# Altium PCB PowerDistribution.PcbDoc (part 1 of 3)
Units mm, origin at the board's own origin, x right, y up, seen from the top; angles counter-clockwise.
Board outline 120 x 100 mm, 4 copper layers (Component Side, Ground, Power, Solder Side), stack 0.844 mm thick; 193 components, 120 nets, 734 pads, 6 vias.
Unrouted connection lines stored in the file: 508.
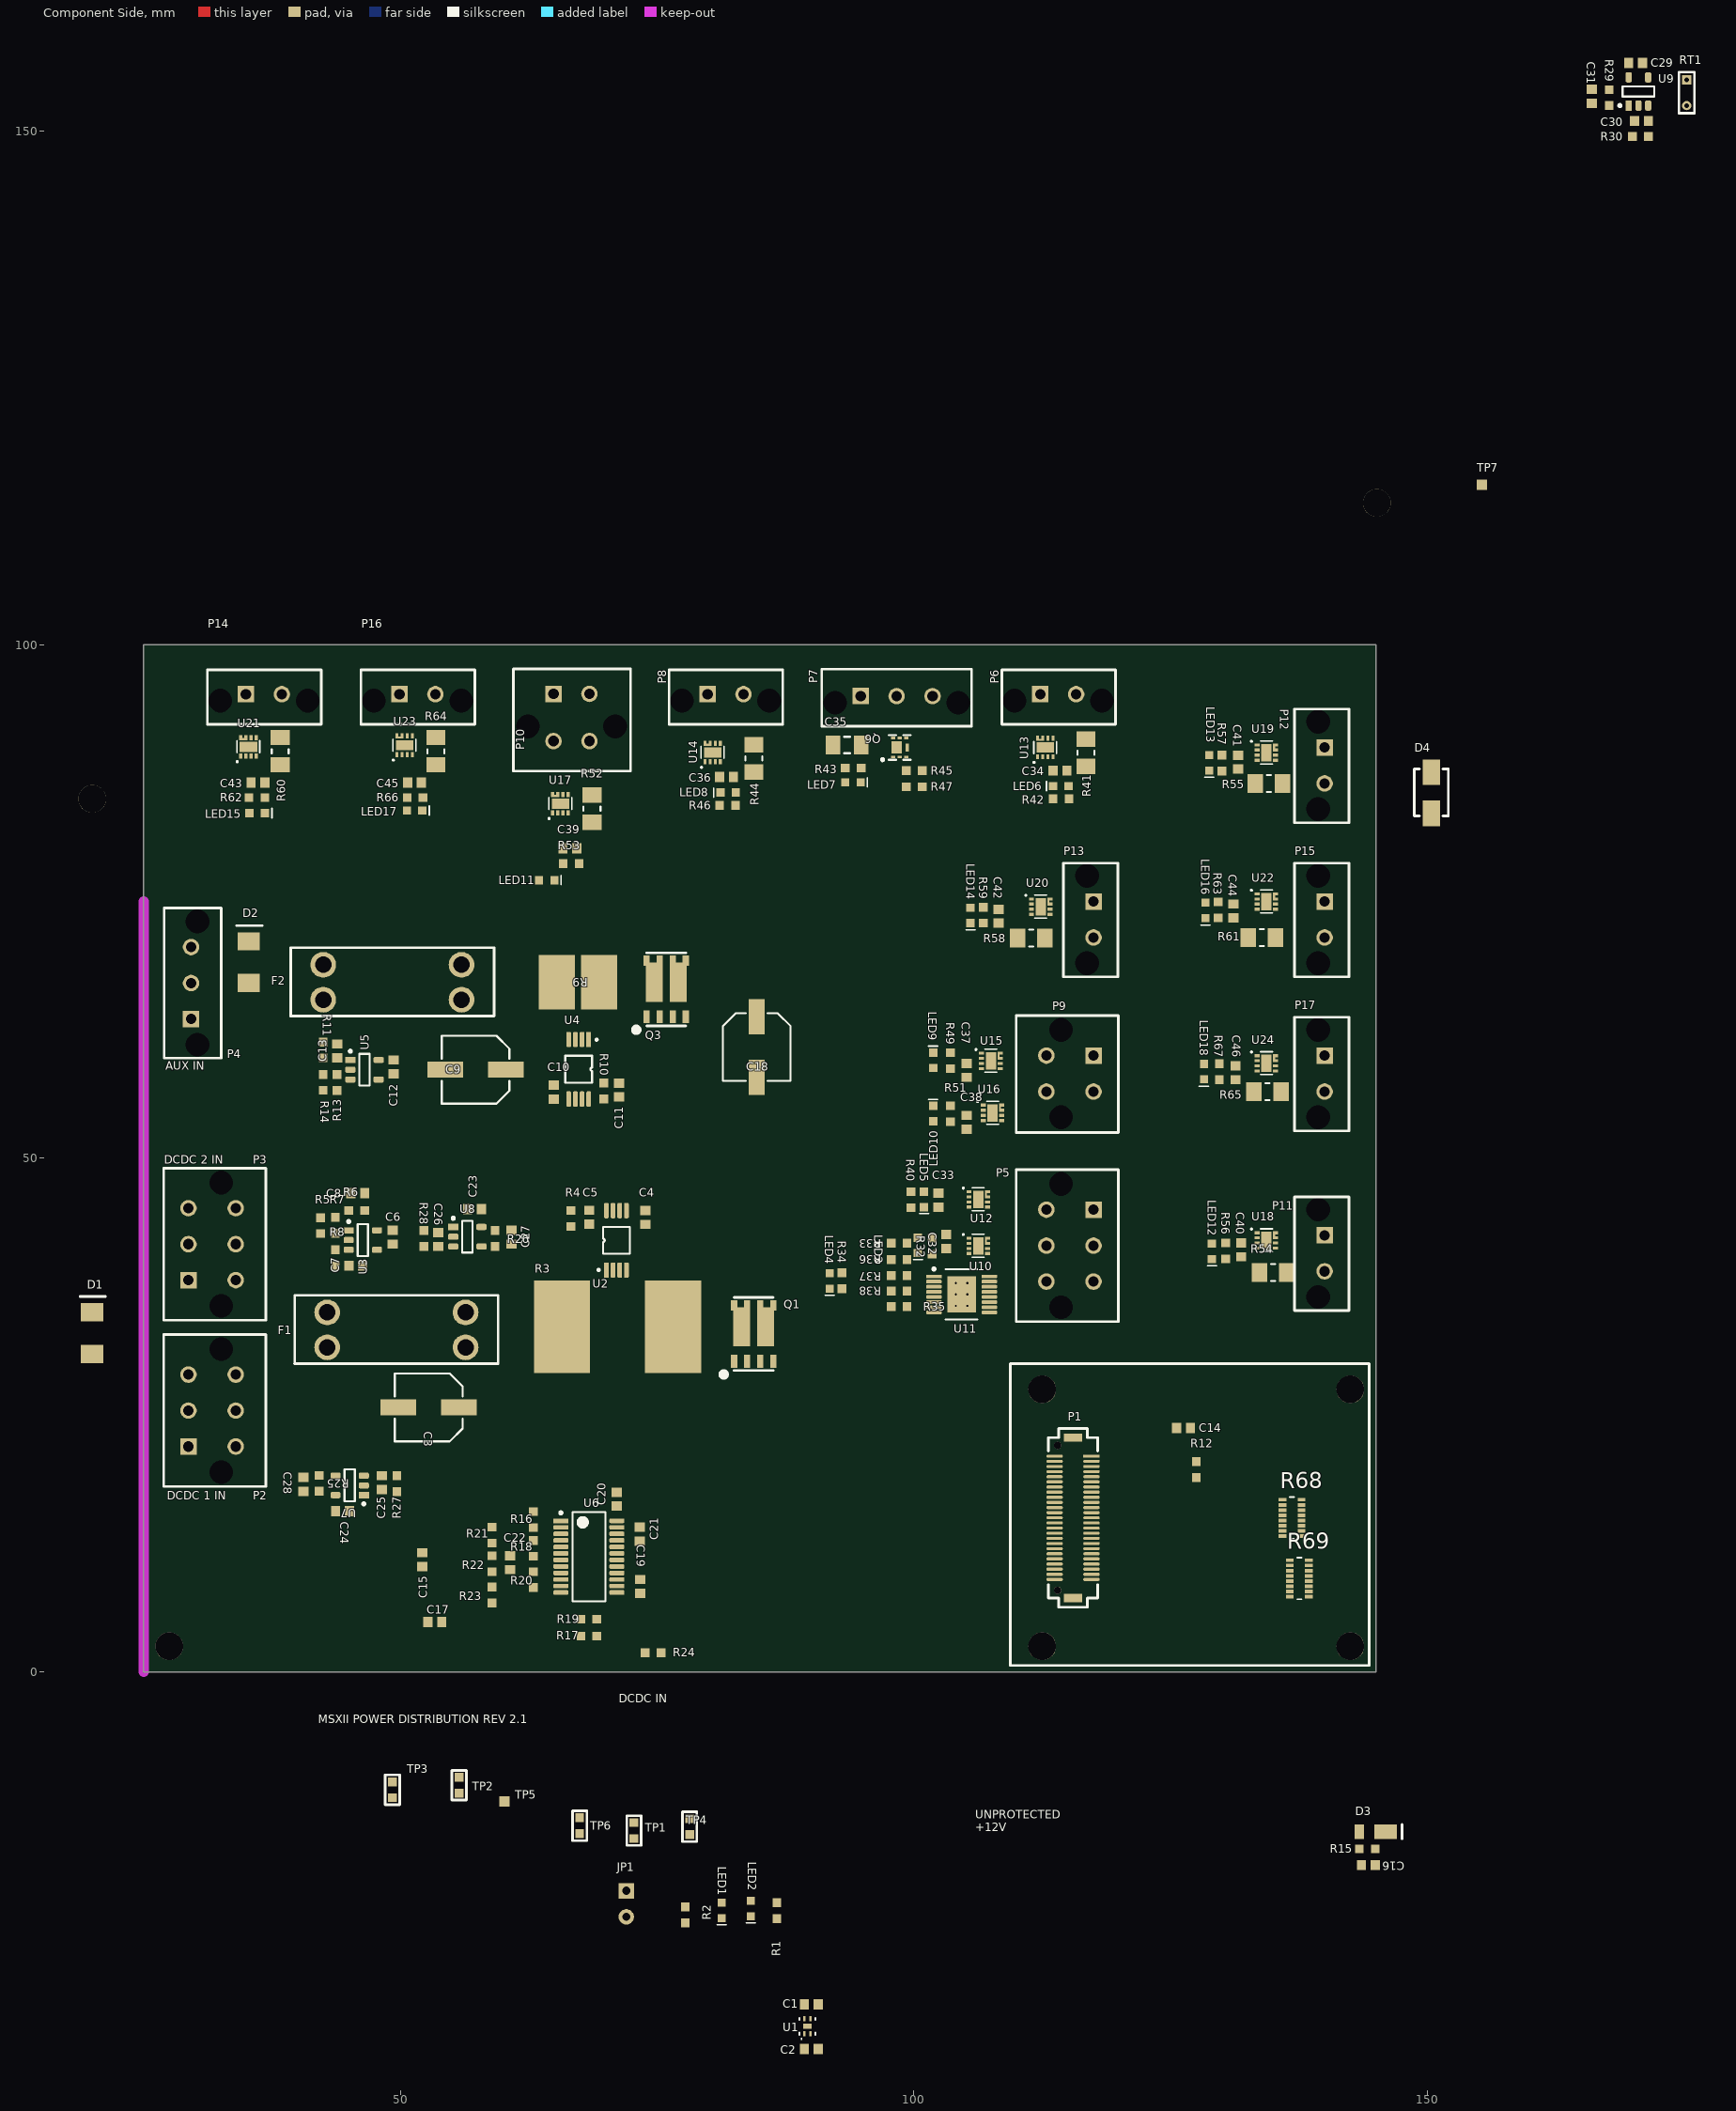
[diagram p0: Component Side view]
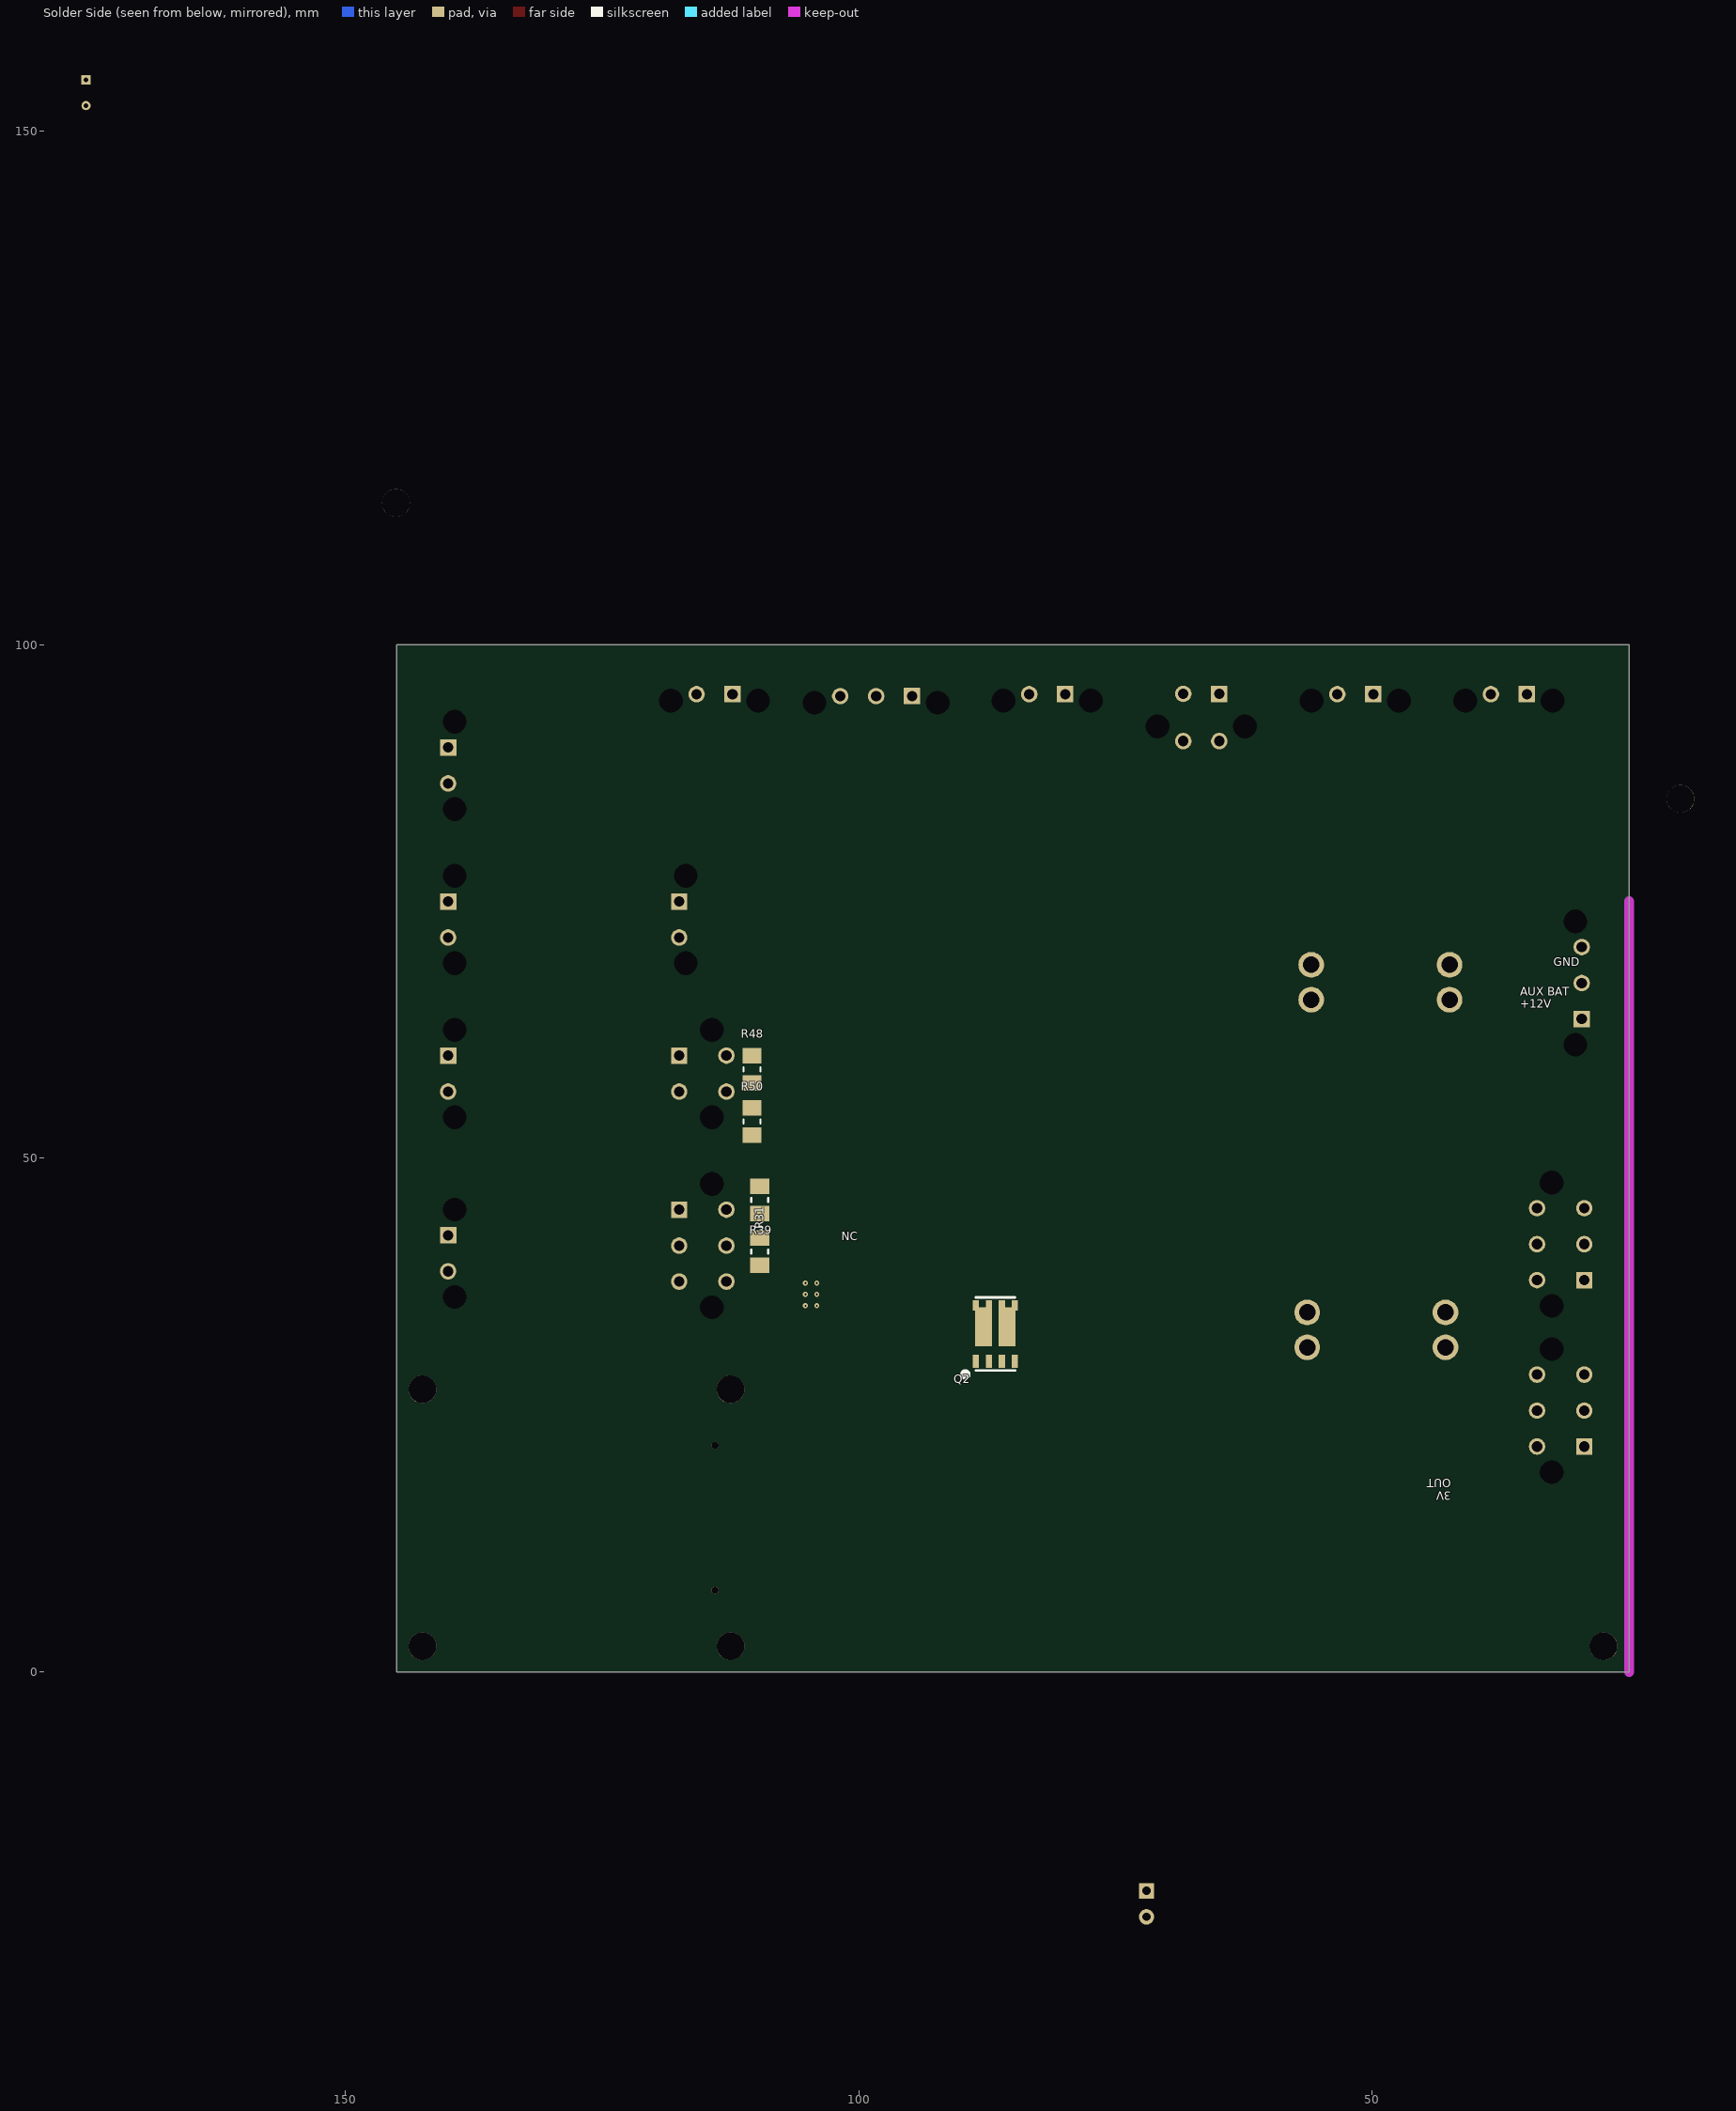
[diagram p1: Solder Side view, seen from below]

## Layer stack, top to bottom
Top Solder: solder mask 0.0102, Solder Resist, Dk 3.5
Component Side: signal copper 0.0356
Dielectric 1: core 0.32, FR-4, Dk 4.8
Ground: signal copper 0.036
Dielectric 3: prepreg 0.127, Dk 4.2
Power: signal copper 0.036
Dielectric 4: core 0.254, Dk 4.2
Solder Side: signal copper 0.0356
Bottom Solder: solder mask 0.0102, Solder Resist, Dk 3.5

## Board outline
25,100 145,100 145,0 25,0

## Design rules (kind name [scope] priority, off if disabled: settings)
BoardOutlineClearance [All] p1: gap=0.3 ignorepadtopadclearanceinfootprint=FALSE
Clearance [All] p1: gap=0.152 ignorepadtopadclearanceinfootprint=TRUE except(0: Arc-Hole Track-Hole SMDPad-Hole THPad-Hole Via-Hole Fill-Hole Poly-Hole Region-Hole Text-Hole)
PlaneConnect "Schematic Power Plane Connect Style_1" [InNetClass('HighCurrent')] p1: planeconnectstyle=Direct reliefexpansion=0.508 reliefentries=4 reliefconductorwidth=0.254 reliefairgap=0.254
PlaneConnect [All] p2: planeconnectstyle=Direct reliefexpansion=0.508 reliefentries=4 reliefconductorwidth=0.254 reliefairgap=0.254
PolygonConnect "Schematic Polygon Connect Style" [InNetClass('HighCurrent')] p1: connectstyle=Direct reliefconductorwidth=0.254 reliefentries=4 polygonreliefangle="45 Angle" airgapwidth=0.254
PolygonConnect Vias [IsVia] p2: connectstyle=Direct reliefconductorwidth=0.254 reliefentries=4 polygonreliefangle="90 Angle" airgapwidth=0.254
PolygonConnect Pads [IsPad AND NOT InNetClass('HighCurrent')] p3: connectstyle=Relief reliefconductorwidth=0.254 reliefentries=4 polygonreliefangle="90 Angle" airgapwidth=0.254
PolygonConnect "High Current" [InNetClass('HighCurrent') and ispad] p4: connectstyle=Direct reliefconductorwidth=0.254 reliefentries=4 polygonreliefangle="90 Angle" airgapwidth=0.254
RoutingVias [All] p1: holewidth=0.3 width=0.6 viastyle="Through Hole" minholewidth=0.305 minwidth=0.762 maxholewidth=0.889 maxwidth=1.651 useviatemplates=TRUE viatemplateguid#1={41F559C4-FE34-4FF1-914F-6CF3D8C9EF6F} viatemplateguid#2={CAA2D8BC-5EEC-4D50-9A6F-782E2C8CEBF2} viatemplatename#1=v50h20 viatemplatename#2=v60h30m0mx0
SolderMaskExpansion [All] p1: expansion=0.102
Width [All] p1: maxlimit=0.254 minlimit=0.254 preferedwidth=0.254
29 further rules are at their usual default settings.

## Classes and differential pairs
component class "Power Distribution - Spare Outputs": C43 C44 C45 C46 LED15 LED16 LED17 LED18 P14 P15 P16 P17 R60 R61 R62 R63 R64 R65 R66 R67 U21 U22 U23 U24
component class "Power Distribution - Roof Enclosure": C37 C38 LED9 LED10 P9 R48 R49 R50 R51 U15 U16
component class "Power Distribution - Misc Boards": C39 C40 C41 C42 LED11 LED12 LED13 LED14 P10 P11 P12 P13 R52 R53 R54 R55 R56 R57 R58 R59 U17 U18 U19 U20
component class "Power Distribution - Aux Battery": C9 C10 C11 C12 C13 C14 D2 F2 P4 R9 R10 R11 R12 R13 R14 TP4 U4 U5
net class HighCurrent: AUX_BAT_IN AUX_FUSED BMS_CARRIER_PWR CHARGER_INTERFACE DCDC_UNFUSED DRV_CTRL_PWR DRV_DISP_PWR FRONT_LIGHTS_PWR FRONT_SOLAR_SENSE GND MOTOR_INTERFACE_EN NetC3_1 NetC9_1 PROT_12V PROT_SPARE1_PWR PROT_SPARE2_PWR REAR_CAMERA_PWR REAR_LIGHTS_PWR REAR_SOLAR_SENSE TELEMETRY_PWR UNPROT_12V UNPROT_SPARE1_PWR UNPROT_SPARE2_PWR VS1 VS2
component class "Power Distribution - Power Path": C15 C16 C17 C18 C19 C20 C21 C22 C_DNP1 C_DNP2 D3 Q1 Q2 Q3 R15 R16 R17 R18 R19 R20 R21 R22 R23 R24 TP5 TP6 TP7 U6
component class "Power Distribution - DC-DC": C3 C4 C5 C6 C7 C8 D1 "DCDC IN" F1 P2 P3 "PROT 12V" R3 R4 R5 R6 R7 R8 TP3 U2 U3
component class "Power Distribution - PJB": C34 C35 C36 D4 LED6 LED7 LED8 P6 P7 P8 Q6 R41 R42 R43 R44 R45 R46 R47 U13 U14
component class "Power Distribution - Front Enclosure": C32 C33 JP1 LED3 LED4 LED5 P5 R31 R32 R33 R34 R35 R36 R37 R38 R39 R40 U10 U11 U12
component class "Power Distribution - Temperature Sense": C23 C24 C25 C26 C27 C28 C29 C30 C31 R25 R26 R27 R28 R29 R30 RT1 U7 U8 U9
component class Controller_Board_Interface: C1 C2 LED1 LED2 P1 R1 R2 R68 R69 TP1 TP2 U1

## Components (designator, comment, footprint, x,y, rotation, side; value= is the part's Value field where it differs from the comment)
C1 "CAP CER 1UF 50V 10% X7R 0603" "CAP, 0603" 90.008,-32.366 r0 top
C2 "CAP CER 1UF 50V 10% X7R 0603" "CAP, 0603" 90.008,-36.725 r0 top
C3 "47uF" "CAP ALUM 6.3MM RADIAL SMD" 52.76,25.742 r180 top
C4 "CAP CER 0.1UF 50V 10% X7R 0603" "CAP, 0603" 73.857,44.239 r270 top
C5 "CAP CER 10nF 50V 5% X7R 0603" "CAP, 0603" 68.393,44.264 r270 top
C6 "CAP CER 0.1UF 50V 10% X7R 0603" "CAP, 0603" 49.265,42.318 r270 top
C7 "CAP CER 10nF 50V 5% X7R 0603" "CAP, 0603" 45.66,39.543 r0 top
C8 "CAP CER 10nF 50V 5% X7R 0603" "CAP, 0603" 45.86,46.604 r180 top
C9 "47uF" "CAP ALUM 6.3MM RADIAL SMD" 57.324,58.627 r180 top
C10 "CAP CER 0.1UF 50V 10% X7R 0603" "CAP, 0603" 64.954,56.446 r90 top
C11 "CAP CER 10nF 50V 5% X7R 0603" "CAP, 0603" 71.285,56.652 r270 top
C12 "CAP CER 0.1UF 50V 10% X7R 0603" "CAP, 0603" 49.361,58.902 r270 top
C13 "CAP CER 10nF 50V 5% X7R 0603" "CAP, 0603" 43.845,60.452 r90 top
C14 "CAP CER 10nF 50V 5% X7R 0603" "CAP, 0603" 126.25,23.726 r0 top
C15 "CAP CER 0.1UF 50V 10% X7R 0603" "CAP, 0603" 52.116,10.927 r270 top
C16 "CAP CER 6800pF 50V 10% X7R 0603" "CAP, 0603" 144.252,-18.808 r0 top
C17 "68nF" "CAP, 0603" 53.357,4.866 r180 top
C18 "100UF" "CAP ALUM 6.3MM RADIAL SMD" 84.7,60.834 r270 top
C19 "CAP CER 0.1UF 50V 10% X7R 0603" "CAP, 0603" 73.357,8.318 r270 top
C20 "CAP CER 0.1UF 50V 10% X7R 0603" "CAP, 0603" 71.082,16.819 r90 top
C21 "CAP CER 0.1UF 50V 10% X7R 0603" "CAP, 0603" 73.315,13.411 r270 top
C22 "CAP CER 0.022UF 50V 10% X7R 0603" "CAP, 0603" 60.68,10.63 r270 top
C23 "CAP CER 0.1UF 50V 10% X7R 0603" "CAP, 0603" 57.227,45.066 r180 top
C24 "CAP CER 0.1UF 50V 10% X7R 0603" "CAP, 0603" 44.368,15.657 r0 top
C25 "CAP CER 10nF 50V 5% X7R 0603" "CAP, 0603" 48.193,18.432 r270 top
C26 "CAP CER 10nF 50V 5% X7R 0603" "CAP, 0603" 53.69,42.093 r90 top
C27 "CAP CER 10nF 50V 5% X7R 0603" "CAP, 0603" 60.818,42.318 r270 top
C28 "CAP CER 10nF 50V 5% X7R 0603" "CAP, 0603" 40.554,18.257 r90 top
C29 "CAP CER 0.1UF 50V 10% X7R 0603" "CAP, 0603" 170.274,156.658 r0 top
C30 "CAP CER 10nF 50V 5% X7R 0603" "CAP, 0603" 170.85,151 r180 top
C31 "CAP CER 10nF 50V 5% X7R 0603" "CAP, 0603" 166,153.4 r270 top
C32 "CAP CER 0.1UF 50V 10% X7R 0603" "CAP, 0603" 103.15,41.9 r90 top
C33 "CAP CER 0.1UF 50V 10% X7R 0603" "CAP, 0603" 102.4,45.925 r90 top
C34 "CAP CER 0.1UF 50V 10% X7R 0603" "CAP, 0603" 114.229,87.75 r0 top
C35 "CAP CER 2.2UF 100V ±20% X7R 1206" "CAP, 1206" 93.498,90.25 r180 top
C36 "CAP CER 0.1UF 50V 10% X7R 0603" "CAP, 0603" 81.764,87.12 r0 top
C37 "CAP CER 0.1UF 50V 10% X7R 0603" "CAP, 0603" 105.15,58.565 r270 top
C38 "CAP CER 0.1UF 50V 10% X7R 0603" "CAP, 0603" 105.15,53.5 r270 top
C39 "CAP CER 0.1UF 50V 10% X7R 0603" "CAP, 0603" 66.509,80.185 r0 top
C40 "CAP CER 0.1UF 50V 10% X7R 0603" "CAP, 0603" 131.87,41.084 r270 top
C41 "CAP CER 0.1UF 50V 10% X7R 0603" "CAP, 0603" 131.575,88.575 r270 top
C42 "CAP CER 0.1UF 50V 10% X7R 0603" "CAP, 0603" 108.25,73.575 r270 top
C43 "CAP CER 0.1UF 50V 10% X7R 0603" "CAP, 0603" 36.139,86.595 r0 top
C44 "CAP CER 0.1UF 50V 10% X7R 0603" "CAP, 0603" 131.12,74.094 r270 top
C45 "CAP CER 0.1UF 50V 10% X7R 0603" "CAP, 0603" 51.38,86.595 r0 top
C46 "CAP CER 0.1UF 50V 10% X7R 0603" "CAP, 0603" 131.325,58.325 r270 top
D1 "DIODE TVS 15VWM 24.4VC DO-214AA (SMB)" "DO-214AA Diode" 19.985,30.943 r90 top
D2 "DIODE TVS 15VWM 24.4VC DO-214AA (SMB)" "DO-214AA Diode" 35.235,67.064 r90 top
D3 "DIODE SCHOTTKY 30V 1A POWERDI123" "DIODE SCHOTTKY 30V 1A POWERDI123" 143.377,-15.55 r0 top
D4 "DIODE SCHOTTKY 60V 3A SMA" "Diode, SMA" 150.38,83.586 r90 top
F1 "?A" "FUSE ATO/ATC FUSE HOLDER" 42.882,35 r0 top
F2 "?A" "FUSE ATO/ATC FUSE HOLDER" 42.49,68.844 r0 top
JP1 "JUMPER" "CONN 2POS JUMPER 0.1\"" 71.998,-21.311 r270 top
LED1 "LED GREEN CLEAR 2V 0603" LED_0603 81.282,-22.525 r270 top
LED2 "LED YELLOW CLEAR 2.1V 0603" LED_0603 84.114,-22.338 r270 top
LED3 "LED GREEN CLEAR 2V 0603" LED_0603 100.365,42.225 r270 top
LED4 "LED YELLOW CLEAR 2.1V 0603" LED_0603 91.79,38.755 r270 top
LED5 "LED YELLOW CLEAR 2.1V 0603" LED_0603 100.965,46.7 r270 top
LED6 "LED YELLOW CLEAR 2.1V 0603" LED_0603 115.004,86.26 r180 top
LED7 "LED GREEN CLEAR 2V 0603" LED_0603 93.373,86.585 r0 top
LED8 "LED GREEN CLEAR 2V 0603" LED_0603 82.614,85.63 r180 top
LED9 "LED GREEN CLEAR 2V 0603" LED_0603 101.91,58.84 r90 top
LED10 "LED YELLOW CLEAR 2.1V 0603" LED_0603 101.91,53.66 r90 top
LED11 "LED YELLOW CLEAR 2.1V 0603" LED_0603 63.559,77.055 r0 top
LED12 "LED YELLOW CLEAR 2.1V 0603" LED_0603 129.01,41.634 r270 top
LED13 "LED YELLOW CLEAR 2.1V 0603" LED_0603 128.74,89.2 r270 top
LED14 "LED YELLOW CLEAR 2.1V 0603" LED_0603 105.49,74.35 r270 top
LED15 "LED GREEN CLEAR 2V 0603" LED_0603 35.364,83.61 r0 top
LED16 "LED YELLOW CLEAR 2.1V 0603" LED_0603 128.393,74.844 r270 top
LED17 "LED GREEN CLEAR 2V 0603" LED_0603 50.689,83.86 r0 top
LED18 "LED YELLOW CLEAR 2.1V 0603" LED_0603 128.24,59.15 r270 top
P1 "CONN 50POS Bergstak Plug 0.02\"" "CONN, Bergstak 50 Pos Plug" 115.5,15 r0 top
P2 "CONN 6POS ULTRA-FIT 0.138\"" "CONN, 6POS ULTRA-FIT" 29.37,21.943 r90 top
P3 "CONN 6POS ULTRA-FIT 0.138\"" "CONN, 6POS ULTRA-FIT" 29.37,38.143 r90 top
P4 "CONN 3POS ULTRA-FIT 0.138\"" "CONN, 3POS ULTRA-FIT"#1 30.25,61.064 r90 top
P5 "CONN 6POS ULTRA-FIT 0.138\"" "CONN, 6POS ULTRA-FIT" 117.5,45 r270 top
P6 "CONN 2POS ULTRA-FIT 0.138\"" "CONN, 2POS ULTRA-FIT" 112.304,95.19 r0 top
P7 "CONN 3POS ULTRA-FIT 0.138\"" "CONN, 3POS ULTRA-FIT"#2 94.82,95 r0 top
P8 "CONN 2POS ULTRA-FIT NATURAL COLOR 0.138\"" "CONN, 2POS ULTRA-FIT - NATURAL COLOR" 79.914,95.19 r0 top
P9 "BLK" "CONN, 4POS 2 ROW ULTRA-FIT" 117.5,60 r270 top
P10 "BLK" "CONN, 4POS 2 ROW ULTRA-FIT" 64.914,95.225 r0 top
P11 "CONN 2POS ULTRA-FIT NATURAL COLOR 0.138\"" "CONN, 2POS ULTRA-FIT - NATURAL COLOR" 140,42.5 r270 top
P12 "CONN 2POS ULTRA-FIT NATURAL COLOR 0.138\"" "CONN, 2POS ULTRA-FIT - NATURAL COLOR" 140,90 r270 top
P13 "CONN 2POS ULTRA-FIT NATURAL COLOR 0.138\"" "CONN, 2POS ULTRA-FIT - NATURAL COLOR" 117.5,75 r270 top
P14 "CONN 2POS ULTRA-FIT 0.138\"" "CONN, 2POS ULTRA-FIT" 34.964,95.19 r0 top
P15 "CONN 2POS ULTRA-FIT NATURAL COLOR 0.138\"" "CONN, 2POS ULTRA-FIT - NATURAL COLOR" 140,75 r270 top
P16 "CONN 2POS ULTRA-FIT 0.138\"" "CONN, 2POS ULTRA-FIT" 49.914,95.19 r0 top
P17 "CONN 2POS ULTRA-FIT NATURAL COLOR 0.138\"" "CONN, 2POS ULTRA-FIT - NATURAL COLOR" 140,60 r270 top
Q1 "MOSFET P-CH DUAL 30V 60A PPAK SO-8" "MOSFET 2P-CH 30V 60A PPAK SO-8" 82.498,30.229 r90 top
Q2 "MOSFET P-CH DUAL 30V 60A PPAK SO-8" "MOSFET 2P-CH 30V 60A PPAK SO-8" 88.618,30.229 r90 bottom
Q3 "MOSFET P-CH DUAL 30V 60A PPAK SO-8" "MOSFET 2P-CH 30V 60A PPAK SO-8" 73.985,63.784 r90 top
Q6 "MOSFET N-CH 30V 8.7A 2.1W 6-PQFN (2x2)" "MOSFET N-CH 30V 12A 2mmx2mm PQFN" 97.97,89.075 r0 top
R1 "RES 4.7K OHM 1% 1/10W 0603" "RES, 0603" 86.666,-23.25 r90 top
R2 "RES 4.7K OHM 1% 1/10W 0603" "RES, 0603" 77.75,-23.653 r90 top
R3 "RES 0.004 OHM 1% 7W 5931" "RES 5931" 65.757,33.59 r0 top
R4 "RES 100 OHM 1% 1/10W 0603" "RES, 0603" 66.618,44.139 r270 top
R5 "RES 470K OHM 1% 1/4W 0603" "RES, 0603" 42.24,43.445 r90 top
R6 "RES 100 OHM 1% 1/10W 0603" "RES, 0603" 45.76,44.92 r0 top
R7 "RES 100K OHM 5% 1/8W 0603" "RES, 0603" 43.673,43.47 r270 top
R8 "RES 10K OHM 1% 1/10W 0603" "RES, 0603" 43.673,40.318 r270 top
R9 "15 mOhm" "RES 2818" 65.247,67.144 r0 top
R10 "RES 100 OHM 1% 1/10W 0603" "RES, 0603" 69.811,56.552 r90 top
R11 "RES 470K OHM 1% 1/4W 0603" "RES, 0603" 42.49,60.552 r270 top
R12 "RES 100 OHM 1% 1/10W 0603" "RES, 0603" 127.5,19.697 r90 top
R13 "RES 100K OHM 5% 1/8W 0603" "RES, 0603" 43.845,57.377 r270 top
R14 "RES 10K OHM 1% 1/10W 0603" "RES, 0603" 42.49,57.396 r90 top
R15 "2.21K" "RES, 0603" 144.152,-17.225 r180 top
R16 "RES 1M OHM 1% 1/10W 0603" "RES, 0603" 62.947,14.822 r270 top
R17 "RES 10K OHM 1% 1/10W 0603" "RES, 0603" 68.357,3.477 r180 top
R18 "RES 11.8K OHM 1% 1/10W 0603" "RES, 0603" 62.947,12.028 r270 top
R19 "RES 10K OHM 1% 1/10W 0603" "RES, 0603" 68.357,5.128 r180 top
R20 "RES 86.6K OHM 1% 1/10W 0603" "RES, 0603" 62.947,8.98 r270 top
R21 "RES 1M OHM 1% 1/10W 0603" "RES, 0603" 58.934,13.311 r270 top
R22 "RES 54.9K OHM 1% 1/10W 0603" "RES, 0603" 58.934,10.53 r270 top
R23 "RES 78.7K OHM 1% 1/10W 0603" "RES, 0603" 58.934,7.482 r270 top
R24 "RES 255K OHM 1% 1/10W 0603" "RES, 0603" 74.607,1.866 r0 top
R25 "RES 100 OHM 1% 1/10W 0603" "RES, 0603" 42.091,18.357 r270 top
R26 "RES 100 OHM 1% 1/10W 0603" "RES, 0603" 59.218,42.193 r90 top
R27 "RES 10K OHM 1% 1/10W 0603" "RES, 0603" 49.663,18.332 r270 top
R28 "RES 10K OHM 1% 1/10W 0603" "RES, 0603" 52.287,42.193 r90 top
R29 "RES 100 OHM 1% 1/10W 0603" "RES, 0603" 167.711,153.275 r90 top
R30 "RES 10K OHM 1% 1/10W 0603" "RES, 0603" 170.75,149.5 r180 top
R31 "200 Ohm" "RES 1206" 109.65,40.925 r270 bottom
R32 "RES 10K OHM 1% 1/10W 0603" "RES, 0603" 101.775,41.45 r90 top
R33 "RES 10K OHM 1% 1/10W 0603" "RES, 0603" 98.565,41.743 r0 top
R34 "RES 10K OHM 1% 1/10W 0603" "RES, 0603" 92.99,38.08 r90 top
R35 "1K" "RES, 0603" 98.565,35.58 r180 top
R36 "RES 10K OHM 1% 1/10W 0603" "RES, 0603" 98.565,40.143 r180 top
R37 "RES 10K OHM 1% 1/10W 0603" "RES, 0603" 98.565,38.58 r180 top
R38 "RES 10K OHM 1% 1/10W 0603" "RES, 0603" 98.565,37.08 r180 top
R39 "200 Ohm" "RES 1206" 109.65,45.95 r270 bottom
R40 "RES 10K OHM 1% 1/10W 0603" "RES, 0603" 99.725,45.975 r90 top
R41 "200 Ohm" "RES 1206" 116.744,89.495 r270 top
R42 "RES 10K OHM 1% 1/10W 0603" "RES, 0603" 114.329,85 r0 top
R43 "RES 10K OHM 1% 1/10W 0603" "RES, 0603" 94.098,88 r180 top
R44 "200 Ohm" "RES 1206" 84.414,88.945 r270 top
R45 "RES 22.1 OHM 1% 1/10W 0603" "RES, 0603" 100.045,87.742 r0 top
R46 "RES 10K OHM 1% 1/10W 0603" "RES, 0603" 81.864,84.37 r0 top
R47 "RES 10K OHM 1% 1/10W 0603" "RES, 0603" 100.045,86.164 r180 top
R48 "200 Ohm" "RES 1206" 110.4,58.665 r270 bottom
R49 "RES 10K OHM 1% 1/10W 0603" "RES, 0603" 103.551,59.515 r90 top
R50 "200 Ohm" "RES 1206" 110.4,53.6 r270 bottom
R51 "RES 10K OHM 1% 1/10W 0603" "RES, 0603" 103.551,54.335 r270 top
R52 "200 Ohm" "RES 1206" 68.659,84.051 r90 top
R53 "RES 10K OHM 1% 1/10W 0603" "RES, 0603" 66.634,78.685 r180 top
R54 "200 Ohm" "RES 1206" 134.995,38.884 r0 top
R55 "200 Ohm" "RES 1206" 134.575,86.5 r0 top
R56 "RES 10K OHM 1% 1/10W 0603" "RES, 0603" 130.37,40.984 r90 top
R57 "RES 10K OHM 1% 1/10W 0603" "RES, 0603" 130,88.475 r90 top
R58 "200 Ohm" "RES 1206" 111.425,71.45 r0 top
R59 "RES 10K OHM 1% 1/10W 0603" "RES, 0603" 106.75,73.675 r90 top
R60 "200 Ohm" "RES 1206" 38.302,89.645 r90 top
R61 "200 Ohm" "RES 1206" 133.895,71.5 r0 top
R62 "RES 10K OHM 1% 1/10W 0603" "RES, 0603" 36.039,85.12 r180 top
R63 "RES 10K OHM 1% 1/10W 0603" "RES, 0603" 129.62,74.194 r90 top
R64 "200 Ohm" "RES 1206" 53.451,89.645 r270 top
R65 "200 Ohm" "RES 1206" 134.425,56.5 r0 top
R66 "RES 10K OHM 1% 1/10W 0603" "RES, 0603" 51.439,85.12 r180 top
R67 "RES 10K OHM 1% 1/10W 0603" "RES, 0603" 129.75,58.425 r90 top
R68 "RES ARRAY 10K OHM 5% 8RES" "RES ARRAY, 8 POS 1506" 136.823,14.988 r0 top value=Value
R69 "RES ARRAY 10K OHM 5% 8RES" "RES ARRAY, 8 POS 1506" 137.528,9.096 r0 top value=Value
RT1 "10K NTC" "NTC THERMISTOR BEAD" 175.25,155 r270 top
TP1 "Test Point 0603 SMD" "TEST POINT 0603 SMD" 72.75,-16.225 r90 top
TP2 "Test Point 0603 SMD" "TEST POINT 0603 SMD" 55.725,-11.813 r90 top
TP3 "Test Point 0603 SMD" "TEST POINT 0603 SMD" 49.23,-12.254 r90 top
TP4 "Test Point 0603 SMD" "TEST POINT 0603 SMD" 78.175,-15.85 r90 top
TP5 "Test Point" "Test Point"#1 60.14,-12.599 r90 top
TP6 "Test Point 0603 SMD" "TEST POINT 0603 SMD" 67.457,-15.75 r90 top
TP7 "Test Point" "Test Point"#2 155.293,115.569 r90 top
U1 "IC REG LDO 3V 0.2A 4-TDFN" "IC REG LDO 3V 0.2A 4-TDFN" 89.333,-35.225 r0 top
U2 "100V/V" "IC CURRENT AMPLIFIER INA240 TSSOP-8" 70.06,39.114 r90 top
U3 "IC OP AMP GEN PURPOSE RR 10MHZ SOT-23-5" "IC OP AMP GP RR 10MHZ SOT-23-5" 46.348,42.043 r0 top
U4 "20 V/V" "IC CURRENT AMPLIFIER INA240 TSSOP-8" 68.342,61.571 r270 top
U5 "IC OP AMP GEN PURPOSE RR 10MHZ SOT-23-5" "IC OP AMP GP RR 10MHZ SOT-23-5" 46.508,58.627 r0 top
U6 "IC OR CONTROLLER SOURCE SELECT 24SSOP" "IC OR CTRLR SRC SELECT 24SSOP" 68.357,11.216 r0 top
U7 "IC OP AMP GEN PURPOSE RR 10MHZ SOT-23-5" "IC OP AMP GP RR 10MHZ SOT-23-5" 45.068,18.157 r180 top
U8 "IC OP AMP GEN PURPOSE RR 10MHZ SOT-23-5" "IC OP AMP GP RR 10MHZ SOT-23-5" 56.527,42.368 r0 top
U9 "IC OP AMP GEN PURPOSE RR 10MHZ SOT-23-5" "IC OP AMP GP RR 10MHZ SOT-23-5" 170.549,153.875 r90 top
U10 "IC LOAD SWITCH ACT-HI 10.5A 8DFN" "IC LOAD SWITCH ACT-HI 10.5A 8DFN" 106.269,41.475 r270 top
U11 "VNQ7040AJTR" "IC DVR HIGH-SIDE 1CH POWERSSO-16" 104.65,36.75 r0 top
U12 "IC LOAD SWITCH ACT-HI 10.5A 8DFN" "IC LOAD SWITCH ACT-HI 10.5A 8DFN" 106.269,46 r270 top
U13 "IC LOAD SWITCH ACT-HI 10.5A 8DFN" "IC LOAD SWITCH ACT-HI 10.5A 8DFN" 112.804,90 r0 top
U14 "IC LOAD SWITCH ACT-HI 10.5A 8DFN" "IC LOAD SWITCH ACT-HI 10.5A 8DFN" 80.414,89.52 r0 top
U15 "IC LOAD SWITCH ACT-HI 10.5A 8DFN" "IC LOAD SWITCH ACT-HI 10.5A 8DFN" 107.5,59.49 r270 top
U16 "IC LOAD SWITCH ACT-HI 10.5A 8DFN" "IC LOAD SWITCH ACT-HI 10.5A 8DFN" 107.65,54.425 r270 top
U17 "IC LOAD SWITCH ACT-HI 10.5A 8DFN" "IC LOAD SWITCH ACT-HI 10.5A 8DFN" 65.584,84.535 r0 top
U18 "IC LOAD SWITCH ACT-HI 10.5A 8DFN" "IC LOAD SWITCH ACT-HI 10.5A 8DFN" 134.32,42.009 r270 top
U19 "IC LOAD SWITCH ACT-HI 10.5A 8DFN" "IC LOAD SWITCH ACT-HI 10.5A 8DFN" 134.32,89.5 r270 top
U20 "IC LOAD SWITCH ACT-HI 10.5A 8DFN" "IC LOAD SWITCH ACT-HI 10.5A 8DFN" 112.35,74.5 r270 top
U21 "IC LOAD SWITCH ACT-HI 10.5A 8DFN" "IC LOAD SWITCH ACT-HI 10.5A 8DFN" 35.214,90.07 r0 top
U22 "IC LOAD SWITCH ACT-HI 10.5A 8DFN" "IC LOAD SWITCH ACT-HI 10.5A 8DFN" 134.32,75 r270 top
U23 "IC LOAD SWITCH ACT-HI 10.5A 8DFN" "IC LOAD SWITCH ACT-HI 10.5A 8DFN" 50.414,90.22 r0 top
U24 "IC LOAD SWITCH ACT-HI 10.5A 8DFN" "IC LOAD SWITCH ACT-HI 10.5A 8DFN" 134.32,59.25 r270 top

## Footprints (in the part's own frame and the unit in brackets; to place one, negate y for a bottom-side part, rotate by r counter-clockwise, add the part's x,y. Pads: shape width x height; smd on the part's side, far side on the other; paste and mask are expansions set on the pad)
"CAP ALUM 6.3MM RADIAL SMD" [mm] "Aluminum Electrolytic Capacitor, Body 6.50x6.50x5.50mm, IPC Low Density"
  rect 3.45x1.55 smd: 1(-2.95,0) 2(2.95,0)
  silkscreen extent -3.3,-3.3 3.3,3.3, body extent -3.9,-3.3 3.9,3.3, height 5.5
"CAP, 0603" [mm] "Chip Capacitor, 2-Leads, Body 1.60x0.81mm, IPC Medium Density"
  rect 0.9x1 smd mask+0.076: 1(-0.675,0) 2(0.675,0)
  body extent -0.87,-0.48 0.87,0.48, height 0.9
"CAP, 1206" [mm] "Chip Capacitor, 2-Leads, Body 3.20x1.60mm, IPC Medium Density"
  rect 1.4x1.8 smd: 1(-1.375,0) 2(1.375,0)
  silkscreen extent -0.3,-0.8 0.3,0.8, body extent -1.68,-0.87 1.67,0.87, height 1.8
"CONN 2POS JUMPER 0.1\"" [mm]
  rect 1.5x1.5 hole 0.8: 1(0,0)
  round 1.5 hole 0.8: 2(2.54,0)
  body extent -1.24,-1.27 3.84,1.27, height 9.25
"CONN, 2POS ULTRA-FIT" [mm] "2 Positions Header, Shrouded Connector 0.138\" (3.50mm) Through Hole Gold"
  rect 1.6x1.6 hole 1.02: 1(0,0)
  round 1.6 hole 1.02: 2(3.5,0)
  round 1.6 hole 2.3: ""(-2.5,-0.63) ""(6,-0.63)
  silkscreen extent -3.74,-2.93 7.33,2.37, body extent -3.48,-2.87 7.12,5.79, height 13.85
"CONN, 2POS ULTRA-FIT - NATURAL COLOR" [mm] "2 Positions Header, Shrouded Connector 0.138\" (3.50mm) Through Hole Gold"
  rect 1.6x1.6 hole 1.02: 1(0,0)
  round 1.6 hole 1.02: 2(3.5,0)
  round 1.6 hole 2.3: ""(-2.5,-0.63) ""(6,-0.63)
  silkscreen extent -3.74,-2.93 7.33,2.37, body extent -3.48,-2.87 7.12,5.79, height 13.85
"CONN, 3POS ULTRA-FIT"#1 [mm]
  rect 1.6x1.6 hole 1.02: 1(2.5,0.63)
  round 1.6 hole 1.02: 2(6,0.63) 3(9.5,0.63)
  round 0 hole 2.3: ""(0,0) ""(12,0)
  silkscreen extent -1.3,-2.3 13.3,3.25, body extent -1.05,-2.04 13.05,6.62, height 13.85
"CONN, 3POS ULTRA-FIT"#2 [mm]
  rect 1.6x1.6 hole 1.02: 1(0,0)
  round 1.6 hole 1.02: 2(3.5,0) 3(7,0)
  round 0 hole 2.3: ""(-2.5,-0.63) ""(9.5,-0.63)
  silkscreen extent -3.8,-2.93 10.8,2.62, body extent -3.55,-2.67 10.55,5.99, height 13.85
"CONN, 4POS 2 ROW ULTRA-FIT" [mm]
  rect 1.6x1.6 hole 1.02: 1(0,0)
  round 1.6 hole 1.02: 2(3.5,0) 3(0,-4.6) 4(3.5,-4.6)
  round 0 hole 2.3: ""(-2.5,-3.18) ""(6,-3.18)
  silkscreen extent -3.9,-7.53 7.5,2.42, body extent -3.55,-8.15 7.05,5.76, height 13.9
"CONN, 6POS ULTRA-FIT" [mm]
  rect 1.6x1.6 hole 1.02: 1(0,0)
  round 1.6 hole 1.02: 2(3.5,0) 3(7,0) 4(0,-4.6) 5(3.5,-4.6) 6(7,-4.6)
  round 0 hole 2.3: ""(-2.5,-3.18) ""(9.5,-3.18)
  silkscreen extent -3.9,-7.53 10.9,2.42, body extent -3.55,-8.25 10.55,5.66, height 13.9
"CONN, Bergstak 50 Pos Plug" [mm] "Bergstak 50 Position Plug"
  rect 1.6x0.3 smd: 1(1.8,6)
  oval 1.6x0.3 smd: 2(1.8,5.5) 3(1.8,5) 4(1.8,4.5) 5(1.8,4) 6(1.8,3.5) 7(1.8,3) 8(1.8,2.5) 9(1.8,2) 10(1.8,1.5) 11(1.8,1) 12(1.8,0.5) 13(1.8,0) 14(1.8,-0.5) 15(1.8,-1) 16(1.8,-1.5) 17(1.8,-2) 18(1.8,-2.5) 19(1.8,-3) 20(1.8,-3.5) 21(1.8,-4) 22(1.8,-4.5) 23(1.8,-5) 24(1.8,-5.5) 25(1.8,-6) 26(-1.8,-6) 27(-1.8,-5.5) 28(-1.8,-5) 29(-1.8,-4.5) 30(-1.8,-4) 31(-1.8,-3.5) 32(-1.8,-3) 33(-1.8,-2.5) 34(-1.8,-2) 35(-1.8,-1.5) 36(-1.8,-1) 37(-1.8,-0.5) 38(-1.8,0) 39(-1.8,0.5) 40(-1.8,1) 41(-1.8,1.5) 42(-1.8,2) 43(-1.8,2.5) 44(-1.8,3) 45(-1.8,3.5) 46(-1.8,4) 47(-1.8,4.5) 48(-1.8,5) 49(-1.8,5.5) 50(-1.8,6)
  round 0.7 hole 0.7: ""(-1.5,-7.05) ""(-1.5,7.05)
  rect 1.8x0.8 smd: ""(0,-7.8) ""(0,7.8)
  silkscreen extent -2.4,-8.7 2.4,8.7
"DIODE SCHOTTKY 30V 1A POWERDI123" [mm] "Diodes Incorporated DFLS130L-7"
  rect 0.9x1.4 smd: 1(0,0)
  rect 2.2x1.4 smd: 2(2.55,0)
  silkscreen extent 4.15,-0.7 4.15,0.7, body extent -0.27,-0.88 3.42,0.9, height 0.98
"Diode, SMA" [mm]
  rect 2.5x1.7 smd: 1(0,0) 2(4,0)
  silkscreen extent -0.25,-1.65 4.32,1.65, body extent -0.69,-1.45 4.59,1.47, height 2.41
"DO-214AA Diode" [mil] "Zener Diode 16V 5W SMBJ5353B-TP"
  rect 70x85 smd: 1(0,0) 2(160,0)
  silkscreen extent 220,-51 220,46
"FUSE ATO/ATC FUSE HOLDER" [mm]
  round 2.5 hole 1.6: 1(0,0) 2(13.47,0) 3(0,-3.4) 4(13.47,-3.4)
  silkscreen extent -3.18,-4.99 16.64,1.67, body extent -3.23,-4.98 16.58,1.75, height 19.1
"IC CURRENT AMPLIFIER INA240 TSSOP-8" [mm]
  rect 1.5x0.45 smd: 1(0,0)
  rrect50% 1.5x0.45 smd: 2(0,-0.65) 3(0,-1.3) 4(0,-1.95) 5(5.8,-1.95) 6(5.8,-1.3) 7(5.8,-0.65) 8(5.8,0)
  silkscreen extent -0.06,-2.28 4.22,0.84, body extent -0.28,-2.52 6.22,0.58, height 1.2
"IC DVR HIGH-SIDE 1CH POWERSSO-16" [mm] "SSOP, 16-Leads, Body 4.90x3.90mm, Pitch 0.50mm, Thermal Pad 3.50x2.80mm, IPC Medium Density"
  rect 1.5x0.35 smd: 1(-2.7,1.75)
  rrect50% 1.5x0.35 smd: 2(-2.7,1.25) 3(-2.7,0.75) 4(-2.7,0.25) 5(-2.7,-0.25) 6(-2.7,-0.75) 7(-2.7,-1.25) 8(-2.7,-1.75) 9(2.7,-1.75) 10(2.7,-1.25) 11(2.7,-0.75) 12(2.7,-0.25) 13(2.7,0.25) 14(2.7,0.75) 15(2.7,1.25) 16(2.7,1.75)
  rect 2.8x3.5 smd: 17(0,0)
  silkscreen extent -2.82,-2.45 1.55,2.6, body extent -3,-2.45 3,2.45, height 1.7
"IC LOAD SWITCH ACT-HI 10.5A 8DFN" [mm]
  rect 0.3x0.5 smd: 1(-0.75,-0.9) 2(-0.25,-0.9) 3(0.25,-0.9) 4(0.75,-0.9) 5(0.75,0.9) 6(0.25,0.9) 7(-0.25,0.9) 8(-0.75,0.9)
  rect 0.8x0.2 smd paste+0 mask+0: 8(-0.5,0.75)
  rect 1.7x1 smd: 9(0,0)
  silkscreen extent -1.12,-1.47 1.1,0.6, body extent -1,-1.05 1,1.05, height 1
"IC OP AMP GP RR 10MHZ SOT-23-5" [mm] "SOT23, 5-Leads, Body 2.90x2.80mm, Pitch 0.95mm, IPC Medium Density"
  rect 1x0.6 smd: 1(-1.375,0.95)
  rrect50% 1x0.6 smd: 2(-1.375,0) 3(-1.375,-0.95) 4(1.375,-0.95) 5(1.375,0.95)
  silkscreen extent -1.5,-1.55 0.5,1.92, body extent -1.5,-1.53 1.5,1.53, height 1.45
"IC OR CTRLR SRC SELECT 24SSOP" [mm] "LTC4417"
  rect 1.45x0.45 smd: 1(-2.725,3.492)
  rrect50% 1.45x0.45 smd: 2(-2.725,2.857) 3(-2.725,2.222) 4(-2.725,1.587) 5(-2.725,0.953) 6(-2.725,0.318) 7(-2.725,-0.318) 8(-2.725,-0.953) 9(-2.725,-1.587) 10(-2.725,-2.222) 11(-2.725,-2.857) 12(-2.725,-3.492) 13(2.725,-3.492) 14(2.725,-2.857) 15(2.725,-2.222) 16(2.725,-1.587) 17(2.725,-0.953) 18(2.725,-0.318) 19(2.725,0.318) 20(2.725,0.953) 21(2.725,1.587) 22(2.725,2.222) 23(2.725,2.857) 24(2.725,3.492)
  silkscreen extent -2.85,-4.35 1.6,4.39, body extent -3,-4.35 3,4.35, height 1.75
"IC REG LDO 3V 0.2A 4-TDFN" [mm] "QFN, 4-Leads, Body 1.20x1.60mm, Pitch 0.50mm/1.40mm, Thermal Pad 0.86x0.50mm, IPC Medium Density"
  rect 0.25x0.5 smd: 1(0,0) 2(0.6,0) 3(0.6,1.44) 4(0,1.44)
  rect 0.86x0.5 smd: 5(0.3,0.715)
  silkscreen extent -0.48,-0.56 1.07,1.54, body extent -0.33,-0.11 0.92,1.54, height 0.6
LED_0603 [mm]
  rect 0.8x0.8 smd: 1(-0.05,0.01) 2(1.45,0.01)
  silkscreen extent 2.09,-0.43 2.09,0.48, body extent -0.1,-0.39 1.5,0.41, height 0.55
"MOSFET 2P-CH 30V 60A PPAK SO-8" [mm] "Mosfet Array 2 P-Channel (Dual) 30V 60A 46W Surface Mount PowerPAK® SO-8 Dual"
  rect 1.27x0.61 smd: 1(0,0) 2(0,-1.27) 3(0,-2.54) 4(0,-3.81)
  rect 1.02x0.61 smd: 5(5.465,-3.81) 6(5.465,-2.54) 7(5.465,-1.27) 8(5.465,0)
  rect 3.81x1.65 smd: 6(3.36,-3.06) 8(3.36,-0.75)
  silkscreen extent -1.52,-3.81 6.22,1.27, body extent -0.76,-4.32 6.1,0.51, height 1.2
"MOSFET N-CH 30V 12A 2mmx2mm PQFN" [mm] "PQFN, 6-Leads, Body 2.00x2.00mm, Pitch 0.65mm/0.50mm, Thermal Pad 1.00x1.20mm, IPC Medium Density"
  rect 0.4x0.25 smd: 1(0,0) 2(0.65,0) 3(1.3,0) 4(1.3,1.85) 5(0.65,1.85) 6(0,1.85)
  rect 1x1.2 smd: 7(0.35,0.925)
  rect 0.3x0.79 smd: 8(1.39,0.925)
  silkscreen extent -1.14,-0.38 1.7,2.12, body extent -0.4,-0.13 1.7,1.97, height 1
"NTC THERMISTOR BEAD" [mm] "NTC Thermistor 10k Bead"
  rect 0.9x0.9 hole 0.45: 1(0,0)
  round 0.9 hole 0.45: 2(2.5,0)
  silkscreen extent -0.75,-0.75 3.25,0.75
"RES 1206" [mm] "Chip Resistor, 2-Leads, Body 3.20x1.60mm, IPC Medium Density"
  rect 1.5x1.85 smd: 1(-1.325,0) 2(1.325,0)
  silkscreen extent -0.2,-0.82 0.2,0.82, body extent -1.73,-0.92 1.73,0.93, height 0.64
"RES 2818" [mm]
  rect 3.51x5.33 smd: 1(0,0) 2(4.1,0)
  body extent -1.52,-2.32 5.57,2.28, height 1.35
"RES 5931" [mm]
  rect 5.45x9 smd: 1(0,0) 2(10.8,0)
  body extent -2.25,-4 12.75,3.75, height 0.77
"RES ARRAY, 8 POS 1506" [mil]
  rect 30x14 smd: 1(-36.5,70) 2(-36.5,50) 3(-36.5,30) 4(-36.5,10) 5(-36.5,-10) 6(-36.5,-30) 7(-36.5,-50) 8(-36.5,-70) 9(36.5,-70) 10(36.5,-50) 11(36.5,-30) 12(36.5,-10) 13(36.5,10) 14(36.5,30) 15(36.5,50) 16(36.5,70)
  silkscreen extent -9,-80 9,80, body extent -21,-77 21,77, height 18
"RES, 0603" [mm] "Chip Resistor, 2-Leads, Body 1.60x0.80mm, IPC Medium Density"
  rect 0.85x0.85 smd: 1(-0.775,0) 2(0.775,0)
  body extent -0.8,-0.4 0.8,0.4, height 0.55
"Test Point"#1 [mm]
  rect 1x1 smd: TP(0,0)
"Test Point"#2 [mm]
  rect 1x1 smd paste-2: TP(0,0)
"TEST POINT 0603 SMD" [mm]
  rect 0.85x0.85 smd paste-2 mask+0.102: 1(0,0)
  rect 0.85x0.85 smd paste-2: 1(1.55,0)
  silkscreen extent -0.67,-0.7 2.22,0.7, body extent -0.02,-0.45 1.58,0.45, height 1.09

## Part data
C1 C2: "1µF ±10% 50V Ceramic Capacitor X7R 0603 (1608 Metric)", Capacitance=1µF, Manufacturer 1="Taiyo Yuden", Manufacturer Part Number 1=UMK107AB7105KA-T, Operating Temperature="-55°C ~ 125°C", Package / Case="0603 (1608 Metric)", Ratings=-, Supplier Part Number 1=587-3247-1-ND, Temperature Coefficient=X7R, Tolerance=±10%, Voltage=50V, ComponentLink1Description=http://www.yuden.co.jp/productdata/catalog/en/mlcc_all_e.pdf, ComponentLink1URL=http://www.yuden.co.jp/productdata/catalog/en/mlcc_all_e.pdf, Height - Seated (Max)=-, Lead Spacing=-, Lead Style=-, Mounting Type="Surface Mount, MLCC", Packaging="Cut Tape (CT)", Part Status=Active, Size / Dimension="0.063\" L x 0.031\" W (1.60mm x 0.80mm)", Supplier 1=Digi-Key, Thickness (Max)="0.037\" (0.95mm)"
C3 C9: library part "CAP ALUM 47UF 20% 35V SMD", "47µF 35V Aluminum Electrolytic Capacitors Radial, Can - SMD 1000 Hrs @ 85°C", Case/Package=Radial, Manufacturer=Panasonic, Manufacturer Part Number=EEE-1VA470WP, Max Operating Temperature=85°C, Min Operating Temperature=-40°C, Package Quantity=1, Ripple Current=70mA, Supplier Part Number 1=PCE3961CT-ND, Tolerance=20%, Voltage Rating=35V, Capacitance=47uF, ComponentLink1Description=https://datasheet.ciiva.com/2983/aba0000ce2-2983926.pdf, ComponentLink1URL=https://datasheet.ciiva.com/2983/aba0000ce2-2983926.pdf, ComponentLink2Description=https://datasheet.ciiva.com/2983/aba0000ce2-2983927.pdf, ComponentLink2URL=https://datasheet.ciiva.com/2983/aba0000ce2-2983927.pdf, ComponentLink3Description=https://datasheet.ciiva.com/14598/70255710-14598937.pdf, ComponentLink3URL=https://datasheet.ciiva.com/14598/70255710-14598937.pdf, ComponentLink4Description=https://datasheet.ciiva.com/15165/getdatasheetpartid-86239-15165868.pdf, ComponentLink4URL=https://datasheet.ciiva.com/15165/getdatasheetpartid-86239-15165868.pdf, ComponentLink5Description=https://datasheet.ciiva.com/16507/aba0000ce2-16507965.pdf, ComponentLink5URL=https://datasheet.ciiva.com/16507/aba0000ce2-16507965.pdf, ComponentLink6Description=https://datasheet.ciiva.com/30206/11aba0000ce2-30206253.pdf, ComponentLink6URL=https://datasheet.ciiva.com/30206/11aba0000ce2-30206253.pdf, Contact Plating=Tin, Diameter=6.3mm, Height=5.4mm, Height - Seated (Max)=0.213inch, Lead Free="Lead Free", Length=5.5mm, Life (Hours)=1000Hour, Mount="Surface Mount,PCB", Packaging="Tape and Reel", Pricing 1="1=0.38, 10=0.263, 100=0.1579, 500=0.11846 (USD)", Radiation Hardening=No, REACH SVHC=Unknown, Ripple Current (AC)=70mA, Stock 1=2820, Supplier 1=Digi-Key, Termination=SMD/SMT, Voltage Rating (DC)=35V
C4 C6 C10 C12 C15 C19 C20 C21 C23 C24 C29 C32 C33 C34 C36 C37 C38 C39 C40 C41 C42 C43 C44 C45 C46: "0.10µF ±10% 50V Ceramic Capacitor X7R 0603 (1608 Metric)", Capacitance=0.1µF, Manufacturer 1="AVX Corporation", Manufacturer Part Number 1=06035C104KAT2A, Operating Temperature="-55°C ~ 125°C", Package / Case="0603 (1608 Metric)", Ratings=-, Supplier Part Number 1=478-5052-1-ND, Temperature Coefficient=X7R, Tolerance=±10%, Voltage=50V, ComponentLink1Description=http://datasheets.avx.com/X7RDielectric.pdf, ComponentLink1URL=http://datasheets.avx.com/X7RDielectric.pdf, Height - Seated (Max)=-, Lead Spacing=-, Lead Style=-, Mounting Type="Surface Mount, MLCC", Packaging="Cut Tape (CT)", Part Status=Active, Size / Dimension="0.063\" L x 0.032\" W (1.60mm x 0.81mm)", Supplier 1=Digi-Key, Thickness (Max)="0.035\" (0.90mm)"
C5 C7 C8 C11 C13 C14 C25 C26 C27 C28 C30 C31: "10000pF ±5% 50V Ceramic Capacitor U2J 0603 (1608 Metric)", Capacitance=10000pF, Manufacturer 1=KEMET, Manufacturer Part Number 1=C0603C103J5JAC7867, Operating Temperature="-55°C ~ 125°C", Package / Case="0603 (1608 Metric)", Ratings=-, Supplier Part Number 1=399-13384-1-ND, Temperature Coefficient=U2J, Tolerance=±5%, Voltage=50V, ComponentLink1Description=http://www.kemet.com/docfinder?Partnumber=C0603C103J5JAC7867, ComponentLink1URL=http://www.kemet.com/docfinder?Partnumber=C0603C103J5JAC7867, Failure Rate=-, Height - Seated (Max)=-, Lead Spacing=-, Lead Style=-, Mounting Type="Surface Mount, MLCC", Packaging="Cut Tape (CT)", Part Status=Active, Size / Dimension="0.063\" L x 0.032\" W (1.60mm x 0.80mm)", Supplier 1=Digi-Key, Thickness (Max)="0.034\" (0.87mm)"
C16: "6800pF ±10% 50V Ceramic Capacitor X7R 0603 (1608 Metric)", Capacitance=6800pF, Manufacturer 1="Samsung Electro-Mechanics America, Inc.", Manufacturer Part Number 1=CL10B682KB8SFNC, Operating Temperature="-55°C ~ 125°C", Package / Case="0603 (1608 Metric)", Ratings=-, Supplier Part Number 1=1276-2103-1-ND, Temperature Coefficient=X7R, Tolerance=±10%, Voltage=50V, ComponentLink1Description=http://www.samsungsem.com/kr/support/product-search/mlcc/CL10B682KB8SFNC.jsp, ComponentLink1URL=http://www.samsungsem.com/kr/support/product-search/mlcc/CL10B682KB8SFNC.jsp, Height - Seated (Max)=-, Lead Spacing=-, Lead Style=-, Mounting Type="Surface Mount, MLCC", Packaging="Cut Tape (CT)", Part Status=Active, Size / Dimension="0.063\" L x 0.031\" W (1.60mm x 0.80mm)", Supplier 1=Digi-Key, Thickness (Max)="0.035\" (0.90mm)"